# EAGLE board MotorDriver v8 (EAGLE 9.7.0)
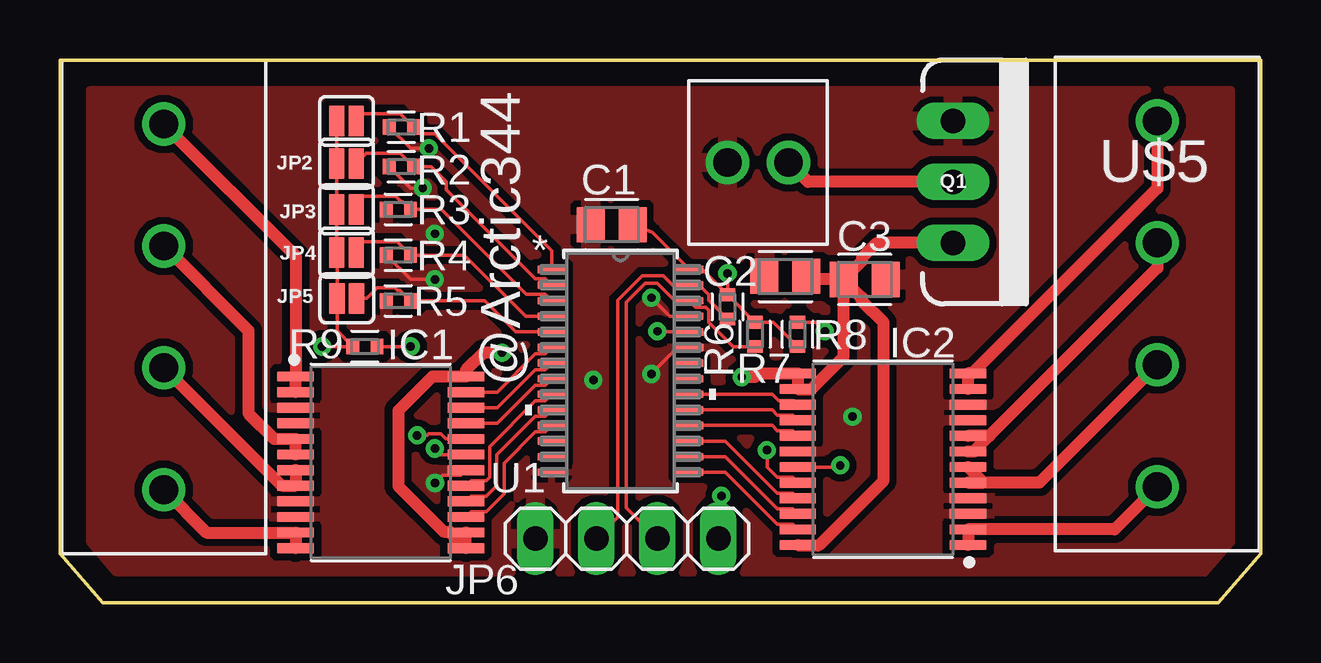
[diagram p0: board, top side]
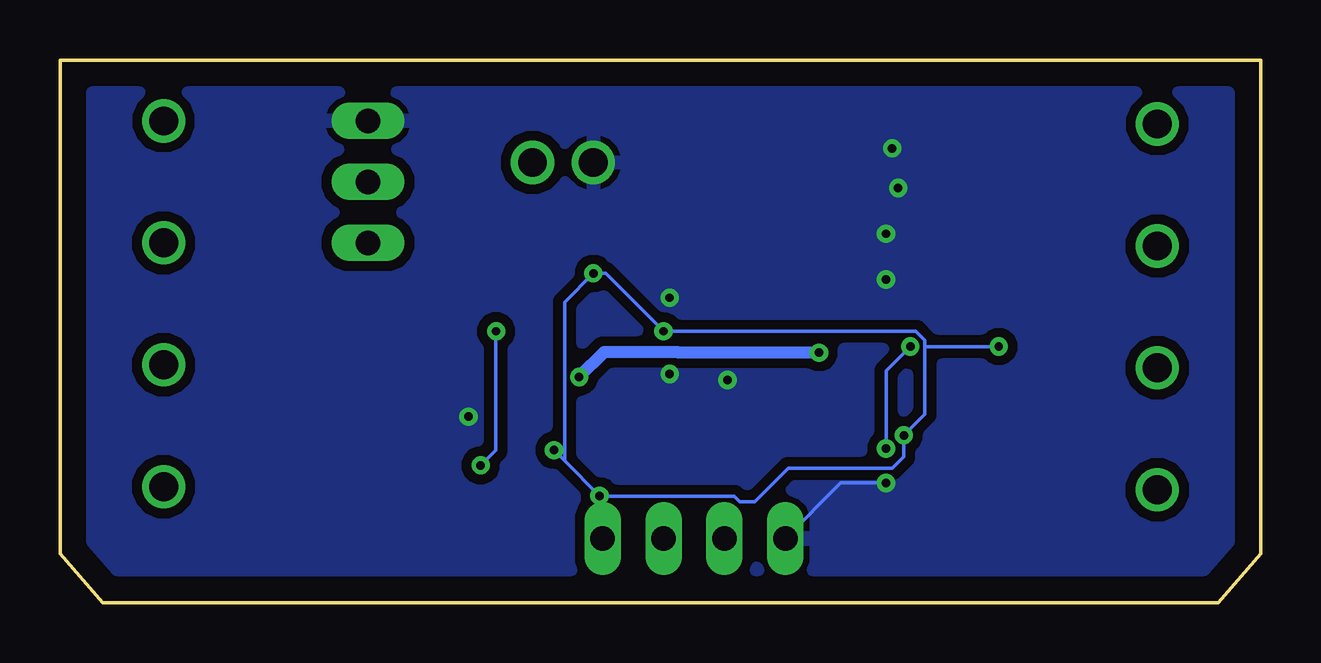
[diagram p1: board, bottom side, seen from below]

Size 50.04 x 22.61 mm. Coordinates in mm from the lower left corner, seen from the top.
Outline: 1.78,0 0,2.03 0,22.61 50.04,22.61 50.04,2.03 48.26,0 1.78,0
Copper layers (1*16): Top / Bottom
Stack-up Default Layer Stack: Top User Defined 0.035mm / Dielectric-1 User Defined 1.5mm / Bottom User Defined 0.035mm
Design rules "default": minimum track width 6mil, minimum drill 0.35mm, track to track 6mil, track to pad 6mil, pad to pad 6mil, via to via 6mil, smd to smd 6mil, copper to edge 40mil, drill to drill 6mil, minimum pad ring 10mil, minimum via ring 8mil, stop-mask expansion 4mil, vias tented up to drill 0mil, thermal gap 10mil

## Footprints (pad centres in the part's own frame; a part is rotated, then mirrored left to right if it is on the bottom)
CAPC2012X110 = smd 1.165 x 1.465: 1 -0.875,0; 2 0.875,0
SOP65P760X160-24N = smd 1.515 x 0.409: 1 -3.548,3.575; 2 -3.548,2.925; 3 -3.548,2.275; 4 -3.548,1.625; 5 -3.548,0.975; 6 -3.548,0.325; 7 -3.548,-0.325; 8 -3.548,-0.975; 9 -3.548,-1.625; 10 -3.548,-2.275; 11 -3.548,-2.925; 12 -3.548,-3.575; 13 3.548,-3.575; 14 3.548,-2.925; 15 3.548,-2.275; 16 3.548,-1.625; 17 3.548,-0.975; 18 3.548,-0.325; 19 3.548,0.325; 20 3.548,0.975; 21 3.548,1.625; 22 3.548,2.275; 23 3.548,2.925; 24 3.548,3.575
SMT-JUMPER_2_NC_PASTE_SILK = smd 0.635 x 1.27: 1 -0.406,0; 2 0.406,0
1X04 = drill 1.016 long: 1 -3.81,0; 2 -1.27,0; 3 1.27,0; 4 3.81,0
TO220V = drill 1.016 long: 1 -2.54,0; 2 0,0; 3 2.54,0
RESC1005X40 = smd 0.535 x 0.644: 1 -0.507,0; 2 0.507,0
SOT361-1_NXP-L = smd 1.168 x 0.305: 1 -2.87,4.225; 2 -2.87,3.575; 3 -2.87,2.925; 4 -2.87,2.275; 5 -2.87,1.625; 6 -2.87,0.975; 7 -2.87,0.325; 8 -2.87,-0.325; 9 -2.87,-0.975; 10 -2.87,-1.625; 11 -2.87,-2.275; 12 -2.87,-2.925; 13 -2.87,-3.575; 14 -2.87,-4.225; 15 2.87,-4.225; 16 2.87,-3.575; 17 2.87,-2.925; 18 2.87,-2.275; 19 2.87,-1.625; 20 2.87,-0.975; 21 2.87,-0.325; 22 2.87,0.325; 23 2.87,0.975; 24 2.87,1.625; 25 2.87,2.275; 26 2.87,2.925; 27 2.87,3.575; 28 2.87,4.225
TERMBLK_254-2N = drill 1.2: 1 0,0; 2 2.54,0
TERMBLK_508-4N = drill 1.2: 1 0,0; 2 5.08,0; 3 10.16,0; 4 15.24,0

## Placement (x,y rotation side)
C1  22uf  [CAPC2012X110]  22.99,15.75 180 top
C2  22uf  [CAPC2012X110]  30.23,13.59 180 top
C3  22uf  [CAPC2012X110]  33.53,13.46 0 top
IC1  TB6612FNGSSOP24  [SOP65P760X160-24N]  13.36,5.84 0 top
IC2  TB6612FNGSSOP24  [SOP65P760X160-24N]  34.29,5.97 180 top
JP1  JUMPER-SMT_2_NC_PASTE_SILK  [SMT-JUMPER_2_NC_PASTE_SILK]  11.94,20.07 0 top
JP2  JUMPER-SMT_2_NC_PASTE_SILK  [SMT-JUMPER_2_NC_PASTE_SILK]  11.94,18.29 0 top
JP3  JUMPER-SMT_2_NC_PASTE_SILK  [SMT-JUMPER_2_NC_PASTE_SILK]  11.94,16.38 0 top
JP4  JUMPER-SMT_2_NC_PASTE_SILK  [SMT-JUMPER_2_NC_PASTE_SILK]  11.94,14.58 0 top
JP5  JUMPER-SMT_2_NC_PASTE_SILK  [SMT-JUMPER_2_NC_PASTE_SILK]  11.95,12.67 0 top
JP6  PINHD-1X4  [1X04]  23.62,2.67 180 top
Q1  24A/20V/50mΩ  [TO220V]  37.21,17.53 270 top
R1  10k  [RESC1005X40]  14.22,19.81 180 top
R2  10k  [RESC1005X40]  14.22,18.16 180 top
R3  10k  [RESC1005X40]  14.1,16.38 180 top
R4  10k  [RESC1005X40]  14.1,14.48 180 top
R5  10k  [RESC1005X40]  14.1,12.57 180 top
R6  10k  [RESC1005X40]  27.81,12.32 90 top
R7  10k  [RESC1005X40]  28.96,11.18 90 top
R8  10k  [RESC1005X40]  30.73,11.18 270 top
R9  10k\  [RESC1005X40]  12.7,10.67 180 top
U1  PCA9685PWSOT361-1_NXP-L  [SOT361-1_NXP-L]  23.35,9.65 0 top
U$1  2828XX-2282834-2  [TERMBLK_254-2N]  30.35,18.33 180 top
U$5  2828XX-4282837-4  [TERMBLK_508-4N]  45.72,20.07 270 top
U$6  2828XX-4282837-4  [TERMBLK_508-4N]  4.32,4.7 90 top

## Library data of the parts
C1-C3 = Capacitor; CATEGORY: Capacitor
IC1 IC2 = IC_Power-Management; CATEGORY: IC_Power-Management; MANUFACTURER: Toshiba; MPN: TB6612FNG,C,8,EL; OPERATING_TEMP: -20 to +85 °C; PART_STATUS: Active; ROHS_COMPLIANT: Compliant; SUB-CATEGORY: Motor Driver; THERMALLOSS: 0.78W
JP1-JP5 = SparkFun-Jumpers
JP6 = Connector; CATEGORY: CONNECTOR; SUB-CATEGORY: PIN-HEADER
Q1 = SparkFun-DiscreteSemi; PROD_ID: TRANS-13060
R1-R9 = Resistor; CATEGORY: Resistor; SUB-CATEGORY: Fixed
U1 = 2023-07-19_03-23-06_Library; COPYRIGHT: Copyright (C) 2023 Ultra Librarian. All rights reserved.; MANUFACTURER_PART_NUMBER: PCA9685PW; MFR_NAME: NXP
U$1 = Connector
U$5 U$6 = Connector; CATEGORY: Connector; DESCRIPTION: TERM BLK 4P SIDE ENT 5.08mm PCB; MANUFACTURER: TE Connectivity; MPN: 282837-4; OPERATING_TEMPERATURE: 40°C to +105°C; PART_STATUS: Active; ROHS_COMPLIANCE: RoHS Compliant; SERIES: 283737; SUBCATEGORY: Terminal Block; TYPE: Side Wire Entry

## Nets
+3.3V: C1.1 IC1.20 IC2.20 JP1.1 JP2.1 JP3.1 JP4.1 JP5.1 JP6.1 R6.2 R7.2 R8.2 R9.2 U1.24 U1.28
+9V: C2.1 C3.1 IC1.13 IC1.14 IC1.24 IC2.13 IC2.14 IC2.24 Q1.3
A1: IC1.1 IC1.2 U$6.4
A2: IC1.5 IC1.6 U$6.3
AD0: JP1.2 R1.1 U1.1
AD1: JP2.2 R2.1 U1.2
AD2: JP3.2 R3.1 U1.3
AD3: JP4.2 R4.1 U1.4
AD4: JP5.2 R5.1 U1.5
B1: IC1.11 IC1.12 U$6.1
B2: IC1.7 IC1.8 U$6.2
C1: IC2.1 IC2.2 U$5.4
C2: IC2.5 IC2.6 U$5.3
D1: IC2.11 IC2.12 U$5.1
D2: IC2.7 IC2.8 U$5.2
GND: C1.2 C2.2 C3.2 IC1.3 IC1.4 IC1.9 IC1.10 IC1.18 IC2.3 IC2.4 IC2.9 IC2.10 IC2.18 JP6.4 Q1.1 R1.2 R2.2 R3.2 R4.2 R5.2 U1.14 U1.23 U1.25 U$1.2
M1A: IC1.21 U1.8
M1B: IC1.22 U1.7
M1P: IC1.23 U1.6
M2A: IC1.17 U1.9
M2B: IC1.16 U1.10
M2P: IC1.15 U1.11
M3A: IC2.21 U1.17
M3B: IC2.22 U1.16
M3P: IC2.23 U1.15
M4A: IC2.17 U1.18
M4B: IC2.16 U1.19
M4P: IC2.15 U1.20
N$12: IC2.19 R8.1
N$15: IC1.19 R9.1
PIN: Q1.2 U$1.1
SDA: JP6.3 R6.1 U1.27
SLC: JP6.2 R7.1 U1.26

## Tracks (layer width: path | path; a pad name or v marks a point on that pad's centre or on a via)
+3.3V  (via drill 0.35)
  Top 0.152: JP1.1 JP2.1 JP3.1 JP4.1 11.54,14.57 JP5.1 11.54,11.32 R9.2 v10.92,10.67 | C1.1 24.68,15.42 U1.28 26.76,13.88 R6.2 | R6.2 R7.2 29.72,11.68 R8.2 | IC2.20 30.53,5.21 29.89,5.21 29.46,5.64 29.46,6.34 v29.45,6.35 | v27.56,4.45 27.56,2.79 JP6.1 | R6.2 v27.81,13.72 | IC1.20 16.08,6.82 15.87,7.03 15.37,7.03 15.31,6.96 v14.88,6.96 | U1.24 24.92,11.28 v24.89,11.3
  Bottom 0.152: v29.45,6.35 29.02,5.91 | 29.02,5.91 v27.56,4.46 | v27.56,4.46 v27.56,4.45 | 29.02,5.91 29.02,12.51 v27.81,13.72 27.3,13.72 v24.89,11.3 14.38,11.3 14,10.92 14,10.67 | 14,10.67 14,9.78 14,7.85 v14.88,6.96 14.88,6.07 15.37,5.59 19.69,5.59 21.08,4.19 21.71,4.19 21.94,4.42 27.52,4.42 v27.56,4.46 | 14,10.67 v10.92,10.67
+9V  (via drill 0.35)
  Top 0.508: IC1.14 IC1.13 16.22,2.96 15.99,2.96 14.09,4.85 14.09,8 15.51,9.42 IC1.24 16.91,9.67 17.66,10.41 v18.42,10.41 | C3.1 31.23,13.46 C2.1 | v28.41,9.4 28.96,9.4 29.1,9.54 IC2.13 IC2.14 31.3,8.89 32.65,10.25 C3.1 | C3.1 33.41,14.22 33.41,14.36 34.04,14.99 Q1.3 | IC2.24 31.63,2.39 34.31,5.08 34.31,11.66 33.41,12.56 33.41,12.7 C3.1
  Bottom 0.508: v18.42,10.41 24.29,10.41 24.31,10.44 26.29,10.44 27.37,10.44 v28.41,9.4
A1
  Top 0.508: U$6.4 9.82,14.44 IC1.1 IC1.2
A2
  Top 0.508: U$6.3 7.85,11.33 7.85,7.89 8.93,6.82 IC1.5 IC1.6
AD0
  Top 0.152: JP1.2 12.64,20.36 14.18,20.36 R1.1 15.01,19.53 15.62,19.53 20.48,14.66 U1.1
AD1
  Top 0.152: JP2.2 12.77,18.71 14.18,18.71 R2.1 15.46,18.16 16.1,17.52 16.1,17.2 19.8,13.5 20.21,13.5 U1.2
AD2
  Top 0.152: JP3.2 12.34,16.7 12.58,16.93 13.99,16.93 14.23,16.7 14.29,16.7 R3.1 15.89,16.38 19.42,12.85 20.21,12.85 U1.3
AD3
  Top 0.152: JP4.2 12.34,14.9 12.48,15.03 14.05,15.03 R4.1 16.85,14.48 19.4,11.93 U1.4
AD4
  Top 0.152: JP5.2 12.78,12.68 13.23,13.12 13.95,13.12 14.06,13.02 14.16,13.02 R5.1 17.69,12.57 18.99,11.28 U1.5
B1
  Top 0.508: U$6.1 6.1,2.92 IC1.11 IC1.12
B2
  Top 0.508: U$6.2 9.23,4.87 9.65,4.87 | 9.65,4.87 IC1.8 | IC1.7 9.82,5.03 9.65,4.87
C1
  Top 0.508: U$5.4 43.94,3.04 IC2.2 IC2.1
C2
  Top 0.508: U$5.3 40.81,4.99 39.12,4.99 38.49,4.99 | IC2.5 38.49,4.99 | IC2.6 38.49,4.99
D1
  Top 0.508: U$5.1 45.72,17.25 38.01,9.54 IC2.12 IC2.11
D2
  Top 0.508: U$5.2 45.72,13.94 38.72,6.94 | 38.72,6.94 IC2.8 | IC2.7 38.07,6.29 38.72,6.94
GND  (via drill 0.35)
  Top 0.152: IC1.18 16.7,5.3 15.94,5.3 v15.62,4.98 | U1.23 25.74,10.63 v24.64,9.53 | R2.2 14.6,17.27 v15.11,17.27 | R4.2 14.6,13.46 v15.62,13.46 | U1.25 25.41,11.93 v24.64,12.7 | R1.2 14.6,18.92 v15.37,18.92
  Bottom 0.152: JP6.4 17.5,4.98 v15.62,4.98
  other vias: 15.62,15.37 33.02,7.75 22.23,9.27
  pour Top (isolate 0.305): 0,22.61 0,2.03 1.78,0 48.26,0 50.04,2.03 50.04,22.61
  pour Bottom (isolate 0.406): 0,22.61 0,2.03 1.78,0 48.26,0 50.04,2.03 50.04,22.61
M1A
  Top 0.152: U1.8 20.21,9.06 19.8,9.06 18.21,7.47 IC1.21
M1B
  Top 0.152: U1.7 20.21,9.71 19.8,9.71 18.21,8.12 IC1.22
M1P
  Top 0.152: U1.6 20.21,10.36 19.8,10.36 18.21,8.77 IC1.23
M2A
  Top 0.152: U1.9 20.21,8.41 19.8,8.41 17.9,6.5 17.9,5.22 17.76,5.08 17.13,5.08 IC1.17
M2B
  Top 0.152: U1.10 20.21,7.76 19.8,7.76 18.2,6.16 18.2,4.87 17.76,4.43 17.13,4.43 IC1.16
M2P
  Top 0.152: U1.11 20.21,7.11 19.8,7.11 18.51,5.81 18.51,4.53 17.76,3.78 17.13,3.78 IC1.15
M3A
  Top 0.152: IC2.21 30.53,4.56 29.89,4.56 27.72,6.73 U1.17
M3B
  Top 0.152: IC2.22 30.53,3.91 29.89,3.91 27.72,6.08 U1.16
M3P
  Top 0.152: IC2.23 30.53,3.26 29.89,3.26 27.72,5.43 U1.15
M4A
  Top 0.152: IC2.17 30.53,7.16 29.89,7.16 29.67,7.38 U1.18
M4B
  Top 0.152: IC2.16 30.53,7.81 29.89,7.81 29.67,8.03 U1.19
M4P
  Top 0.152: IC2.15 30.58,8.41 29.94,8.41 29.67,8.68 U1.20
N$12  (via drill 0.35)
  Top 0.152: v32.51,5.71 32.44,5.64 IC2.19 | R8.1 31.49,11.68 v31.87,11.3
  Bottom 0.152: v32.51,5.71 31.88,6.35 31.88,11.29 v31.87,11.3
N$15  (via drill 0.35)
  Top 0.152: R9.1 v14.6,10.67 | IC1.19 15.69,6.17 15.62,6.24 v15.62,6.42
  Bottom 0.152: v14.6,10.67 15.62,9.65 v15.62,6.42
PIN
  Top 0.508: U$1.1 31.16,17.53 Q1.2
SDA
  Top 0.152: R6.1 27.34,12.28 27.34,12.3 27.04,12.61 27.04,12.82 26.63,13.23 U1.27 25.53,13.23 25.14,13.61 24.26,13.61 23.24,12.59 23.24,3.56 JP6.3
SLC
  Top 0.152: R7.1 28.04,10.67 27.04,11.67 27.04,12.17 26.9,12.31 26.49,12.31 U1.26 25.62,12.58 24.89,13.31 24.39,13.31 23.6,12.52 23.6,3.96 JP6.2

## Text on the board
tPlace: @Arctic344